# EAGLE board v001 (EAGLE 6.4)
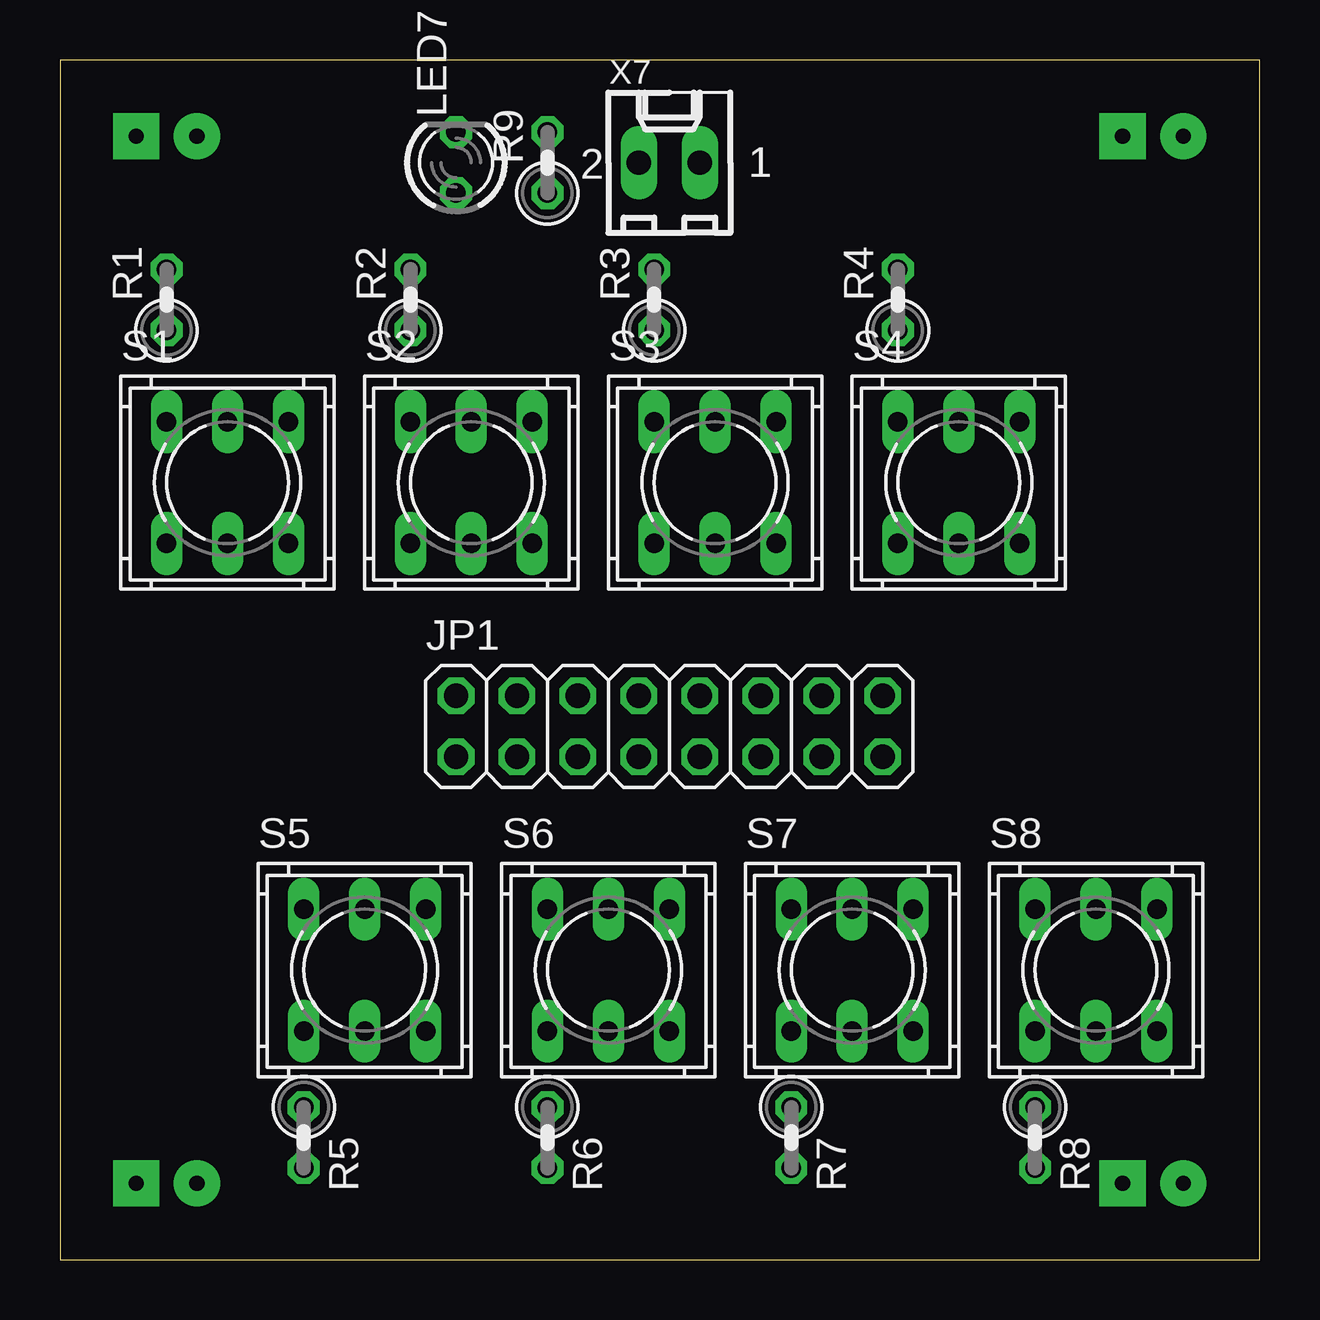
[diagram p0: board, top side]
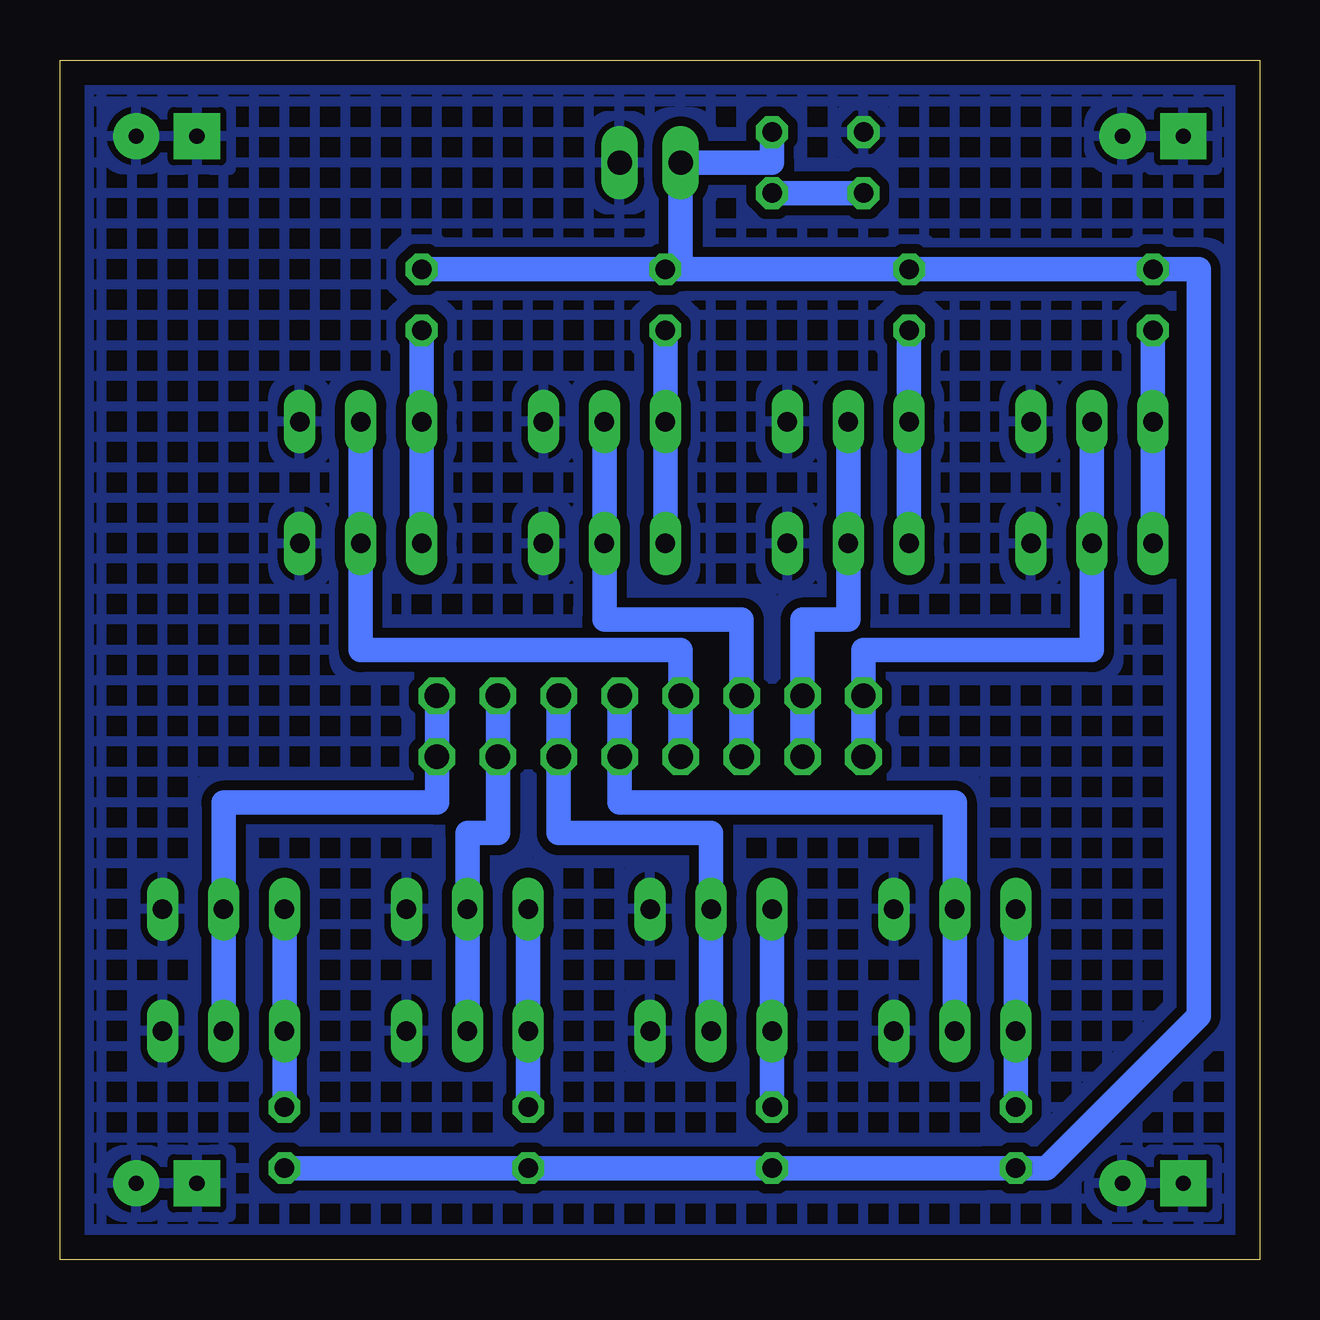
[diagram p1: board, bottom side, seen from below]

Size 50 x 50 mm. Coordinates in mm from the lower left corner, seen from the top.
Outline: 0,0 50,0 50,50 0,50 0,0
Copper layers (1*16): Top 0.035mm / dielectric 1.5mm / Bottom 0.035mm
Design rules "default": minimum track width 10mil, minimum drill 24mil, track to track 8mil, track to pad 8mil, pad to pad 8mil, via to via 8mil, smd to smd 8mil, copper to edge 40mil, drill to drill 8mil, minimum pad ring 10mil, minimum via ring 8mil, stop-mask expansion 4mil, vias tented up to drill 0mil, thermal gap 10mil

## Footprints (pad centres in the part's own frame; a part is rotated, then mirrored left to right if it is on the bottom)
2X08 = drill 1.016 octagon: 1 -8.89,-1.27; 2 -8.89,1.27; 3 -6.35,-1.27; 4 -6.35,1.27; 5 -3.81,-1.27; 6 -3.81,1.27; 7 -1.27,-1.27; 8 -1.27,1.27; 9 1.27,-1.27; 10 1.27,1.27; 11 3.81,-1.27; 12 3.81,1.27; 13 6.35,-1.27; 14 6.35,1.27; 15 8.89,-1.27; 16 8.89,1.27
LED3MM = drill 0.813 octagon: A -1.27,0; K 1.27,0
PCB_05X05 = drill 0.64 pad 1.93 square: GND@1 3.175,46.825; GND@2 44.285,46.825; GND@7 3.175,3.175; GND@8 44.285,3.175 | drill 0.64 pad 1.93: GND@3 46.825,46.825; GND@4 5.715,46.825; GND@5 46.825,3.175; GND@6 5.715,3.175
0207/2V = drill 0.813 octagon: 1 -1.27,0; 2 1.27,0
9077-2 = drill 0.813 long: 1 -2.54,2.54; 2 0,2.54; 3 2.54,2.54; 4 -2.54,-2.54; 5 0,-2.54; 6 2.54,-2.54
6410-02 = drill 1.016 long: 1 1.27,0; 2 -1.27,0

## Placement (x,y rotation side)
JP1  Output  [2X08]  25.4,22.23 0 top
LED7  Green  [LED3MM]  16.51,45.72 90 top
PCB1  PCB05X05  [PCB_05X05]  0,0 0 top
R1  1K  [0207/2V]  4.45,40.01 90 top
R2  1K  [0207/2V]  14.61,40.01 90 top
R3  1K  [0207/2V]  24.77,40.01 90 top
R4  1K  [0207/2V]  34.92,40.01 90 top
R5  1K  [0207/2V]  10.16,5.08 270 top
R6  1K  [0207/2V]  20.32,5.08 270 top
R7  1K  [0207/2V]  30.48,5.08 270 top
R8  1K  [0207/2V]  40.64,5.08 270 top
R9  470R  [0207/2V]  20.32,45.72 90 top
S1  9077-2  [9077-2]  6.99,32.38 0 top
S2  9077-2  [9077-2]  17.14,32.38 0 top
S3  9077-2  [9077-2]  27.3,32.38 0 top
S4  9077-2  [9077-2]  37.47,32.38 0 top
S5  9077-2  [9077-2]  12.7,12.06 0 top
S6  9077-2  [9077-2]  22.86,12.06 0 top
S7  9077-2  [9077-2]  33.02,12.06 0 top
S8  9077-2  [9077-2]  43.18,12.06 0 top
X7  Power  [6410-02]  25.4,45.72 0 top

## Library data of the parts
JP1 = pinhead
LED7 = led
PCB1 = GNLib
R1-R8 = rcl
R9 = resistor
S1-S8 = switch-misc
X7 = con-molex; OC_FARNELL: unknown; OC_NEWARK: unknown

## Nets
+5V: R1.2 R2.2 R3.2 R4.2 R5.2 R6.2 R7.2 R8.2 R9.2 X7.2
GND: LED7.K PCB1.GND@1 PCB1.GND@2 PCB1.GND@3 PCB1.GND@4 PCB1.GND@5 PCB1.GND@6 PCB1.GND@7 PCB1.GND@8 S1.3 S1.6 S2.3 S2.6 S3.3 S3.6 S4.3 S4.6 S5.3 S5.6 S6.3 S6.6 S7.3 S7.6 S8.3 S8.6 X7.1
N$1: R4.1 S4.1 S4.4
N$2: R3.1 S3.1 S3.4
N$3: R2.1 S2.1 S2.4
N$4: R1.1 S1.1 S1.4
N$5: R8.1 S8.1 S8.4
N$6: R7.1 S7.1 S7.4
N$7: R6.1 S6.1 S6.4
N$8: R5.1 S5.1 S5.4
N$20: LED7.A R9.1
OUT1: JP1.1 JP1.2 S1.2 S1.5
OUT2: JP1.3 JP1.4 S2.2 S2.5
OUT3: JP1.5 JP1.6 S3.2 S3.5
OUT4: JP1.7 JP1.8 S4.2 S4.5
OUT5: JP1.9 JP1.10 S5.2 S5.5
OUT6: JP1.11 JP1.12 S6.2 S6.5
OUT7: JP1.13 JP1.14 S7.2 S7.5
OUT8: JP1.15 JP1.16 S8.2 S8.5

## Tracks (layer width: path | path; a pad name or v marks a point on that pad's centre or on a via)
+5V
  Bottom 1.016: R9.2 20.32,45.72 X7.2 24.13,41.27 | 24.13,41.27 R3.2 R4.2 | 24.13,41.27 R2.2 R1.2 2.54,41.27 2.54,10.16 8.89,3.81 R5.2 11.43,3.81 R6.2 R7.2 R8.2
GND
  pour Bottom (isolate 0.406, hatched): 0,0 50.16,0 50.16,50.16 0,50.16
N$1
  Bottom 1.016: R4.1 S4.1 S4.4
N$2
  Bottom 1.016: R3.1 S3.1 S3.4
N$3
  Bottom 1.016: R2.1 S2.1 S2.4
N$4
  Bottom 1.016: R1.1 S1.1 S1.4
N$5
  Bottom 1.016: S8.1 S8.4 R8.1
N$6
  Bottom 1.016: S7.1 S7.4 R7.1
N$7
  Bottom 1.016: S6.1 S6.4 R6.1
N$8
  Bottom 1.016: S5.1 S5.4 R5.1
N$20
  Bottom 1.016: R9.1 LED7.A
OUT1
  Bottom 1.016: S1.2 S1.5 6.99,25.4 16.51,25.4 JP1.2 JP1.1
OUT2
  Bottom 1.016: S2.2 S2.5 17.14,26.67 19.05,26.67 JP1.4 JP1.3
OUT3
  Bottom 1.016: S3.2 S3.5 27.3,26.67 21.59,26.67 JP1.6 JP1.5
OUT4
  Bottom 1.016: S4.2 S4.5 37.47,25.4 24.13,25.4 JP1.8 JP1.7
OUT5
  Bottom 1.016: JP1.10 JP1.9 26.67,19.05 12.7,19.05 S5.2 S5.5
OUT6
  Bottom 1.016: JP1.12 JP1.11 29.21,17.78 22.86,17.78 S6.2 S6.5
OUT7
  Bottom 1.016: JP1.14 JP1.13 31.75,17.78 33.02,17.78 S7.2 S7.5
OUT8
  Bottom 1.016: JP1.16 JP1.15 34.29,19.05 43.18,19.05 S8.2 S8.5